# Altium PCB Y2.PcbDoc (part 1 of 2)
Units mm, origin at the board's own origin, x right, y up, seen from the top; angles counter-clockwise.
Board outline 43.44 x 34.75 mm, 4 copper layers (Top Layer, Layer 1, Layer 2, Bottom Layer), stack 1.627 mm thick; 51 components, 77 nets, 335 pads, 113 vias.
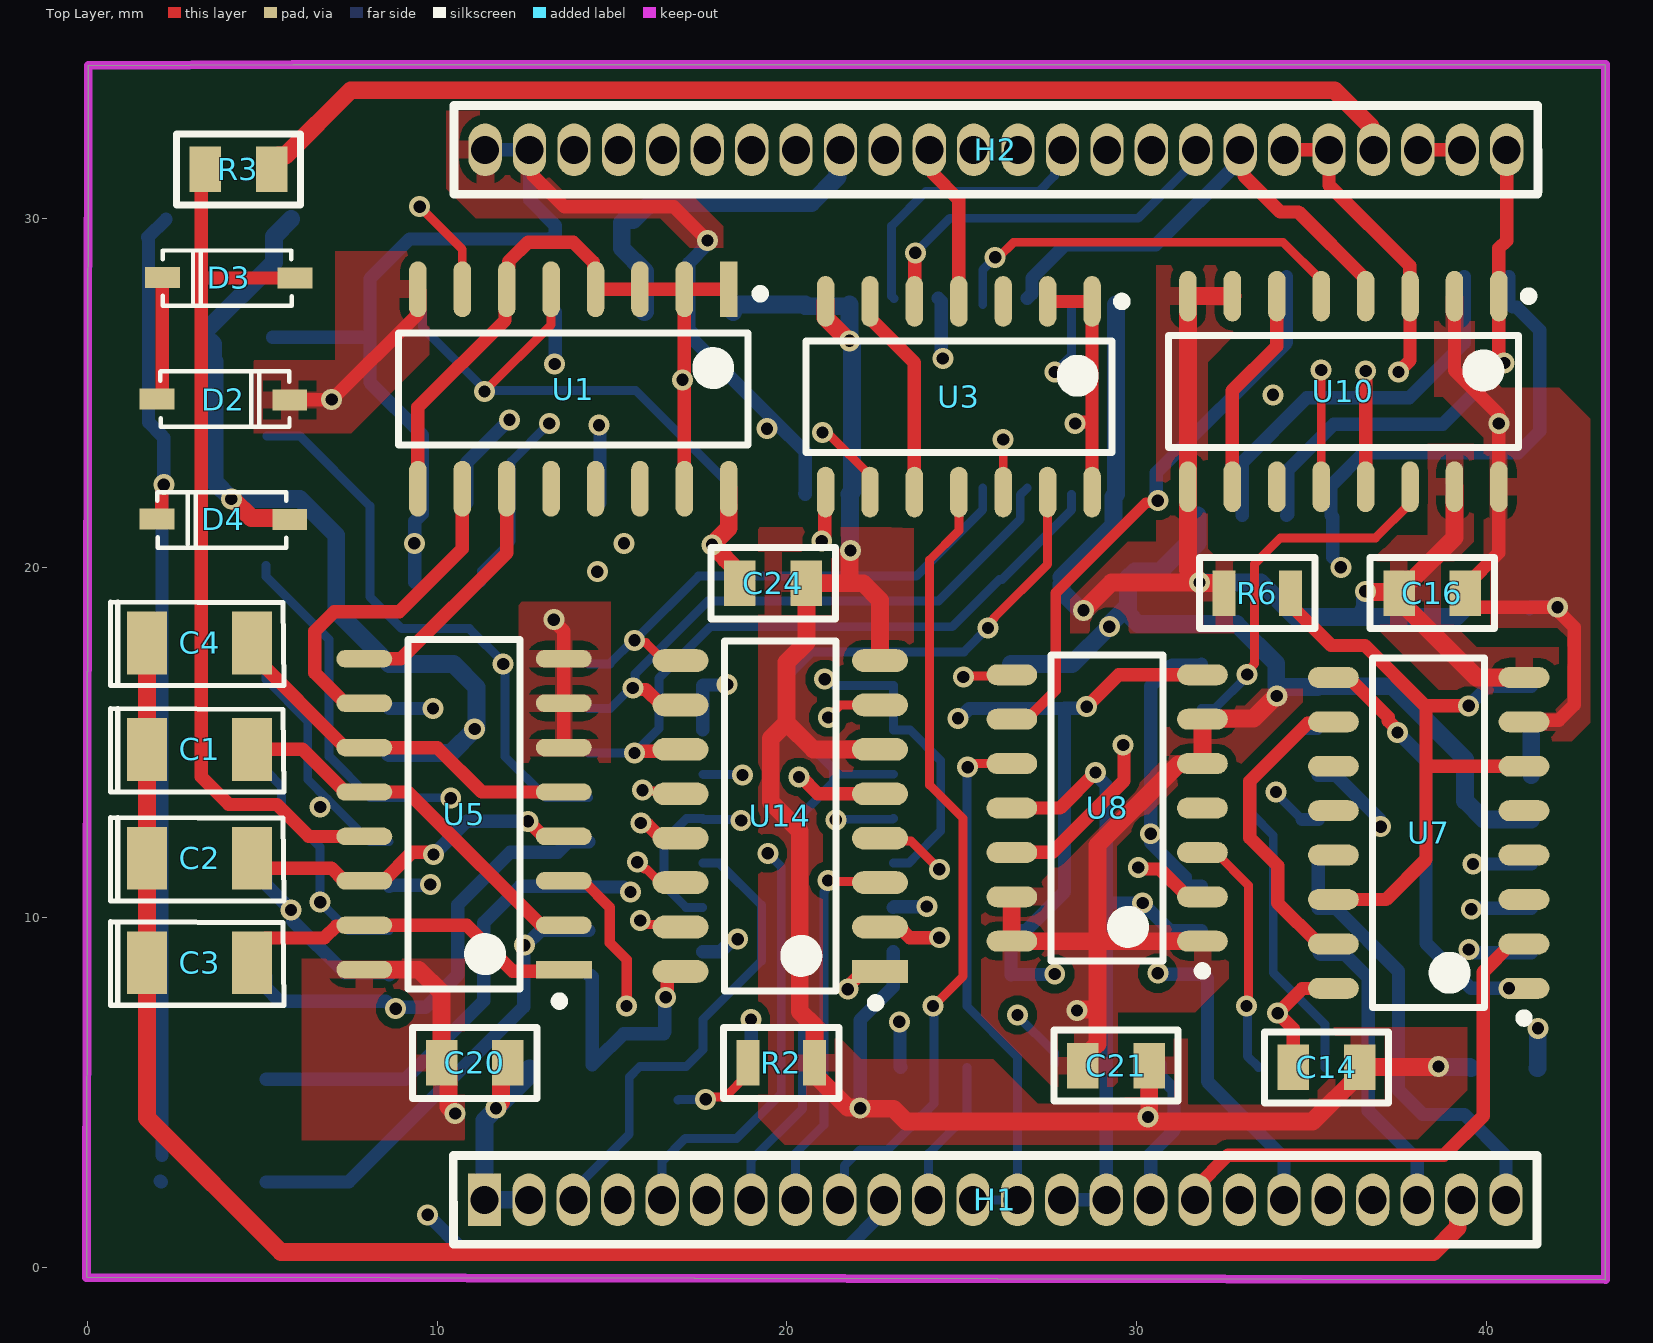
[diagram p0: Top Layer view]
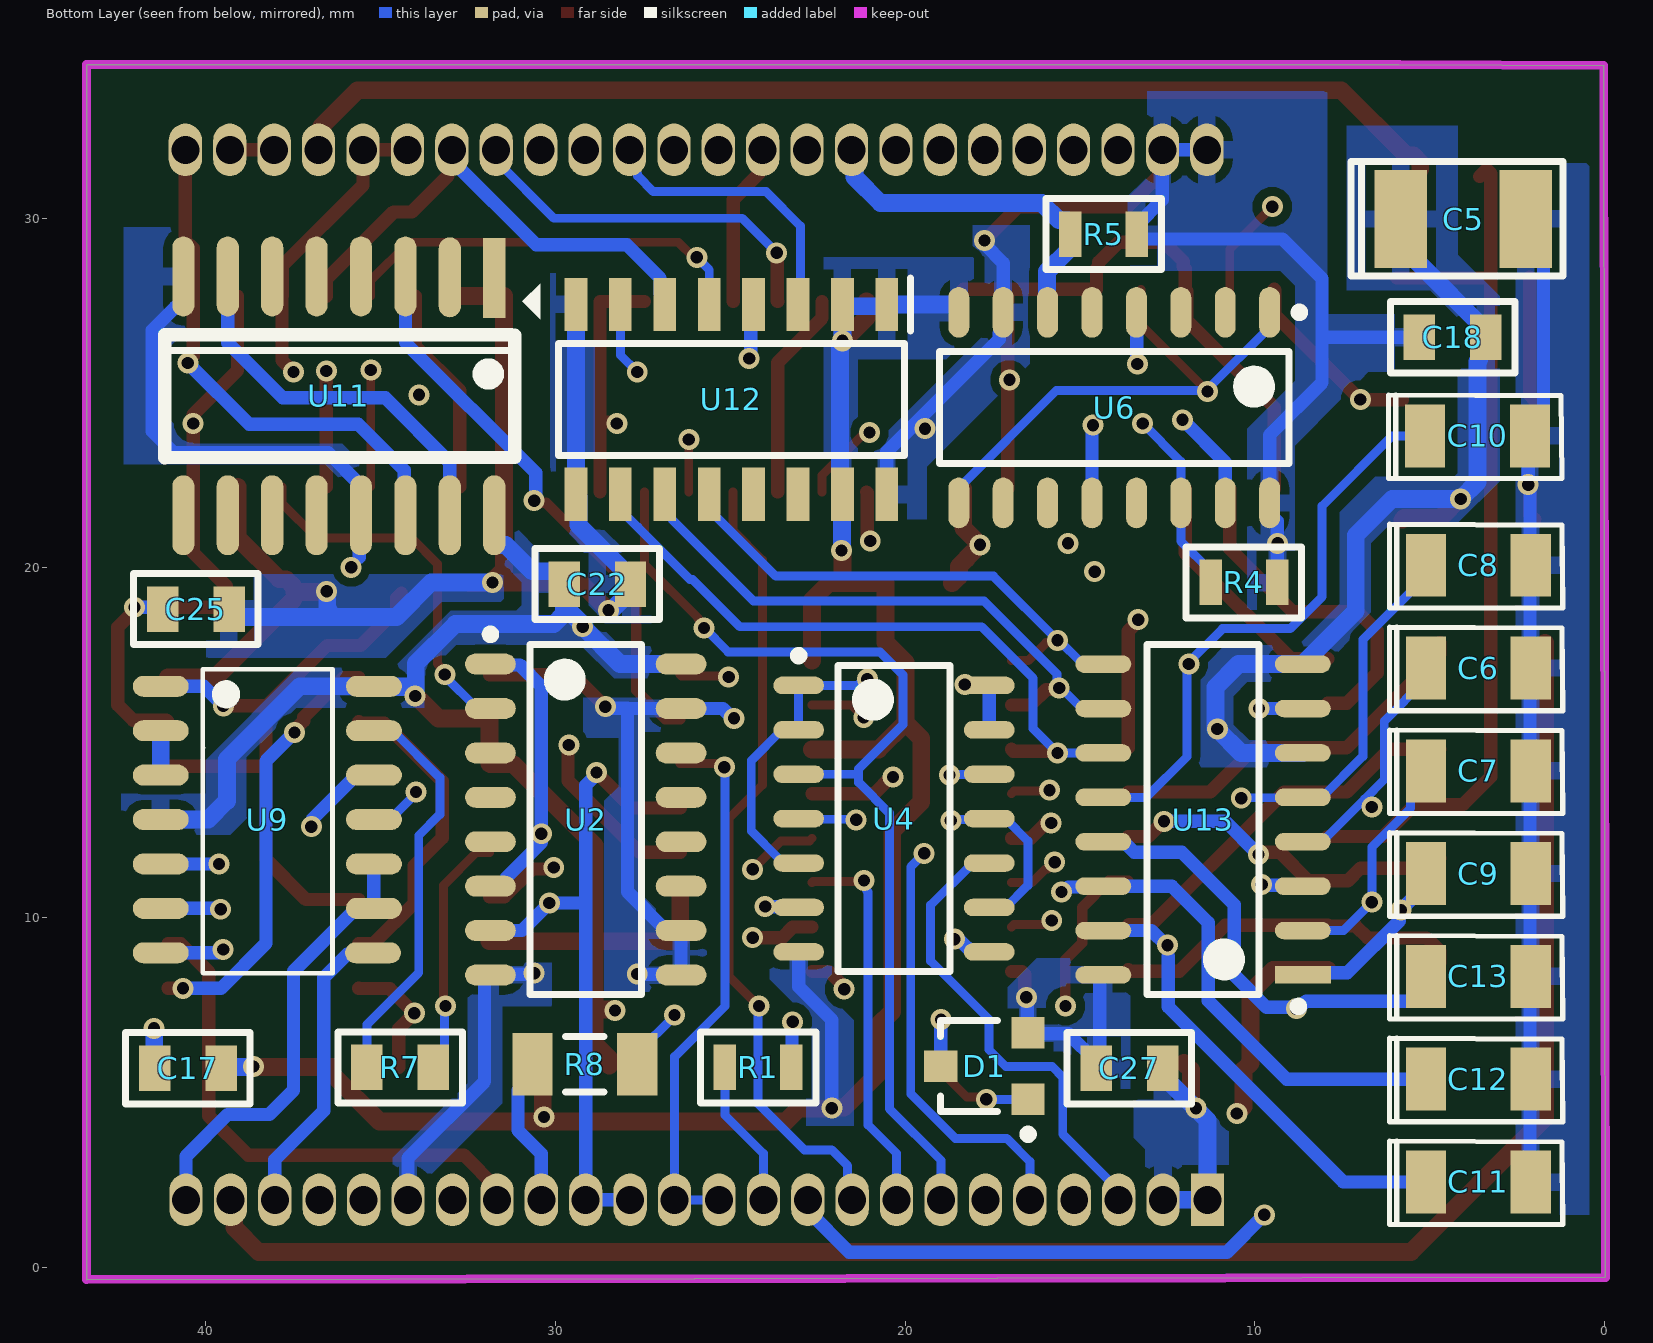
[diagram p1: Bottom Layer view, seen from below]
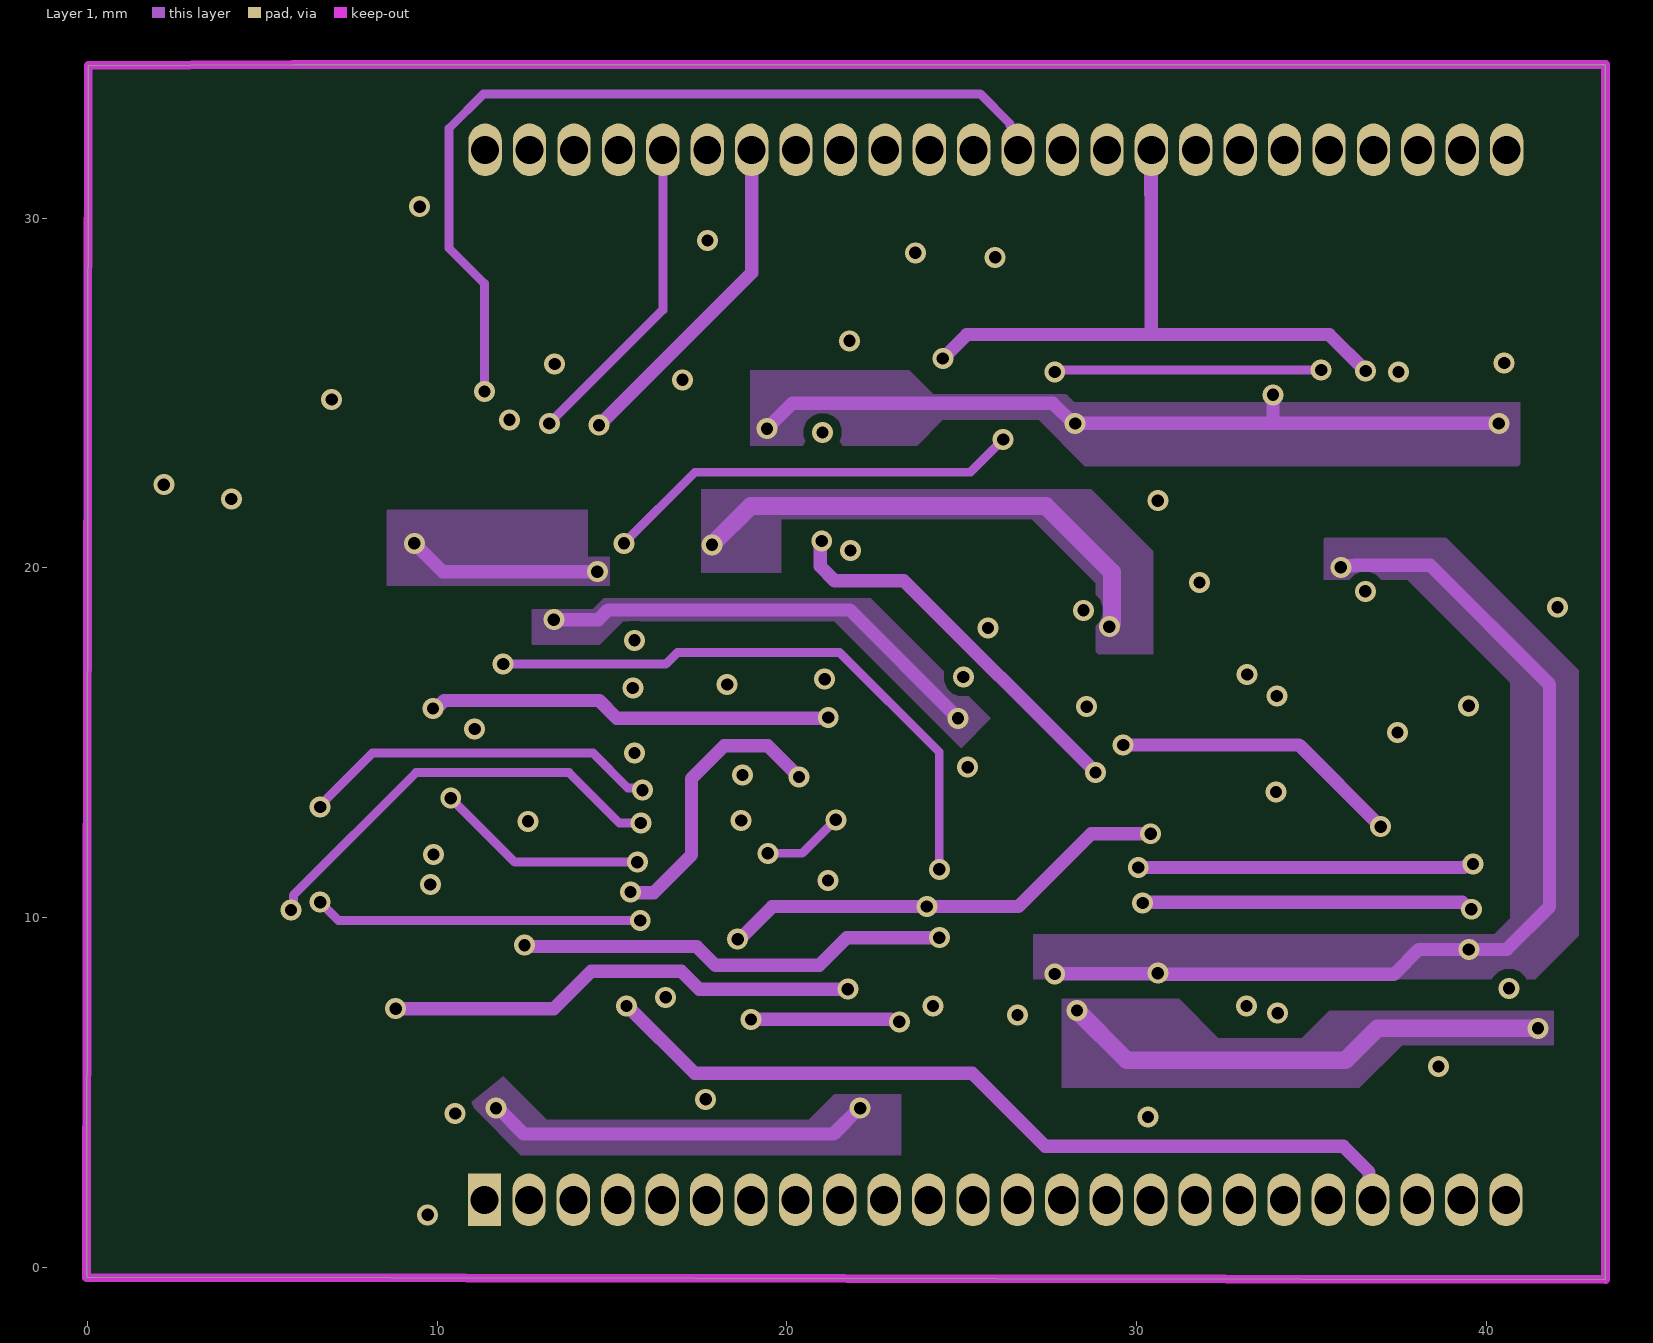
[diagram p2: Layer 1]
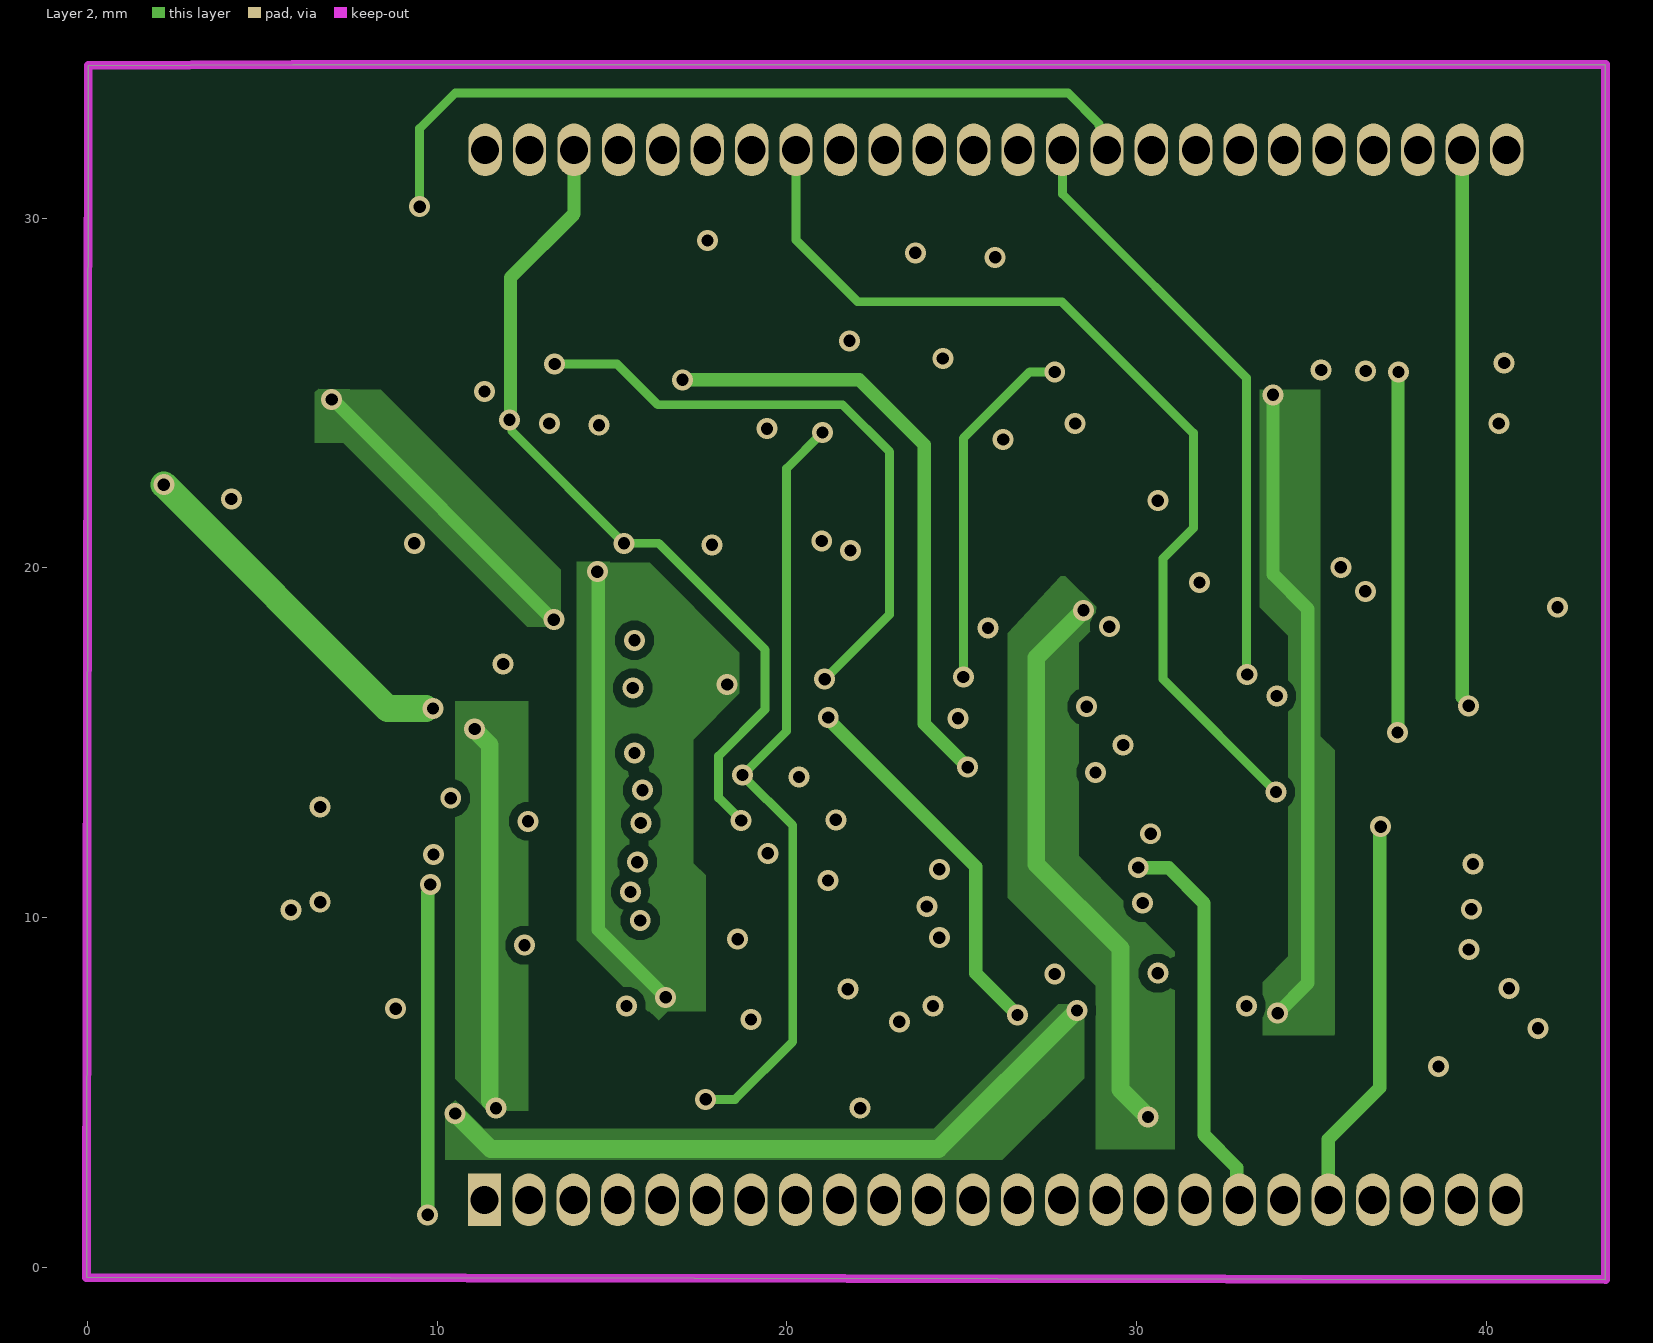
[diagram p3: Layer 2]

## Layer stack, top to bottom
Top Solder: solder mask 0.0102, Solder Resist, Dk 3.5
Top Layer: signal copper 0.0356
Dielectric 2: prepreg 0.2104, PP-006, Dk 4.1
Layer 1: signal copper 0.035
Dielectric 1: dielectric 1.065, FR-4, Dk 4.8
Layer 2: signal copper 0.035
Dielectric 3: prepreg 0.2104, PP-006, Dk 4.1
Bottom Layer: signal copper 0.0356
Bottom Solder: solder mask 0.0102, Solder Resist, Dk 3.5

## Board outline
-0.026,-0.291 43.409,-0.355 43.409,34.392 5.865,34.392 0.023,34.364

## Design rules (kind name [scope] priority, off if disabled: settings)
Clearance [All] p1: gap=0.254 ignorepadtopadclearanceinfootprint=FALSE
MinimumSolderMaskSliver [All] p1: minsoldermaskwidth=0.102
PolygonConnect PolygonConnect_VIA [IsVia] p1: connectstyle=Direct reliefconductorwidth=0.254 reliefentries=4 polygonreliefangle="90 Angle" airgapwidth=0.254
PolygonConnect [All] p2: connectstyle=Relief reliefconductorwidth=0.508 reliefentries=4 polygonreliefangle="90 Angle" airgapwidth=0.254
RoutingVias [All] p1: holewidth=0.35 width=0.6 viastyle="Through Hole" minholewidth=0.3 minwidth=0.5 maxholewidth=0.4 maxwidth=0.6
SilkToSolderMaskClearance [IsPad] p1: minsilkscreentomaskgap=0.102 clearancetoexposedcopper=TRUE
SolderMaskExpansion [All] p1: expansion=0.102 istentingtop=FALSE
Width Width_PWR [(InNet('GND_9V') OR InNet('+5V') OR InNet('+9V'))] p1: maxlimit=2.54 minlimit=0.381 preferedwidth=0.762
Width [All] p2: maxlimit=2.54 minlimit=0.254 preferedwidth=0.381
28 further rules are at their usual default settings.

## Components (designator, comment, footprint, x,y, rotation, side; value= is the part's Value field where it differs from the comment)
C1 "6.8uF/16V" 3216 3.204,14.808 r0 top value="47uF/16 - 50V"
C2 "6.8uF/16V" 3216 3.204,11.694 r0 top value="47uF/16 - 50V"
C3 "6.8uF/16V" 3216 3.204,8.707 r0 top value="47uF/16 - 50V"
C4 "6.8uF/16V" 3216 3.204,17.856 r0 top value="47uF/16 - 50V"
C5 "22uF/16V" 3528 4.039,29.972 r90 bottom value=10uF/50V
C6 "3.3uF/16V" 3216 3.607,17.134 r180 bottom value=10uF/50V
C7 "3.3uF/16V" 3216 3.607,14.195 r180 bottom value=10uF/50V
C8 "3.3uF/16V" 3216 3.607,20.073 r180 bottom value=10uF/50V
C9 "3.3uF/16V" 3216 3.607,11.256 r180 bottom value=10uF/50V
C10 "3.3uF/16V" 3216 3.632,23.774 r180 bottom value=10uF/50V
C11 "3.3uF/16V" 3216 3.607,2.438 r180 bottom value=10uF/50V
C12 "3.3uF/16V" 3216 3.607,5.378 r180 bottom value=10uF/50V
C13 "3.3uF/16V" 3216 3.607,8.317 r180 bottom value=10uF/50V
C14 "C0.1uF_50V" C0805 35.433,5.715 r180 top
C16 "C0.1uF_50V" C0805 38.456,19.279 r0 top
C17 "C0.1uF_50V" C0805 40.513,5.69 r0 bottom
C18 "C0.1uF_50V" C0805 4.343,26.594 r0 bottom
C20 "C0.1uF_50V" C0805 11.074,5.842 r180 top
C21 "C0.1uF_50V" C0805 29.413,5.766 r180 top
C22 "C0.1uF_50V" C0805 28.804,19.533 r0 bottom
C24 "C0.1uF_50V" C0805 19.609,19.558 r180 top
C25 "C0.1uF_50V" C0805 40.284,18.821 r0 bottom
C27 "C0.1uF_50V" C0805 13.589,5.69 r0 bottom
D1 "BAW56" sot-23 16.485,4.801 r90 bottom
D2 "1N4148" SOD123 3.886,24.812 r0 top
D3 "1N4148" SOD123 4.039,28.296 r180 top
D4 "1N4148" SOD123 3.886,21.387 r180 top
H1 "Header 24" "header 24"#1 25.959,1.927 r0 top
H2 "Header 24" "header 24"#2 25.978,31.953 r180 top
R1 "20k" R0805 24.206,5.715 r180 bottom
R2 "20k" R0805 19.837,5.842 r0 top
R3 "10k" C0805 4.318,31.394 r0 top
R4 "10k" R0805 10.312,19.583 r180 bottom
R5 "10k" R0805 14.326,29.54 r0 bottom
R6 "51k" R0805 33.452,19.279 r180 top
R7 "51k" C0805 34.442,5.715 r0 bottom
R8 "10k" 1206 28.778,5.169 r180 bottom
U1 "U1-MC14008" soic16n#1 13.894,25.113 r270 top
U2 "CD4520BM" D0016A_N#1 29.134,12.802 r180 bottom
U3 "CD4001BM" D0014A_N#1 24.917,24.892 r270 top
U4 "CD4011BM" D0014A_N#1 20.32,12.827 r180 bottom
U5 "U5-CD4052" soic16n#1 10.77,12.954 r180 top
U6 "CD4015BM" D0016A_N#1 14.021,24.58 r270 bottom
U7 "CD4015BM" D0016A_N#1 38.354,12.421 r180 top
U8 "CD4030BM" D0014A_N#2 29.159,13.132 r180 top
U9 "CD4016" SOIC14 38.252,12.802 r180 bottom
U10 "CD4520BM" D0016A_N#2 35.916,25.044 r270 top
U11 "CD4022BCM" SOP16 36.195,24.917 r0 bottom
U12 "MC14008BDR2G" SOIC127P600X175-16N 24.968,24.816 r270 bottom
U13 "KP2-CD4051" soic16n#1 11.481,12.802 r0 bottom
U14 "CD4051" soic16n#2 19.812,12.903 r180 top

## Footprints (in the part's own frame and the unit in brackets; to place one, negate y for a bottom-side part, rotate by r counter-clockwise, add the part's x,y. Pads: shape width x height; smd on the part's side, far side on the other; paste and mask are expansions set on the pad)
1206 [mm]
  rect 1.15x1.8 smd: 1(-1.881,0.635) 2(1.119,0.635)
  silkscreen extent -0.93,-0.16 0.17,1.44, body extent -2.08,-0.26 1.32,1.54, height 1
3216 [mm] "Tantalum type A 1206"
  rect 1.15x1.8 smd: 1(-1.5,0) 2(1.5,0)
  silkscreen extent -2.54,-1.22 2.41,1.17, body extent -1.7,-0.9 1.7,0.9, height 1
3528 [mm] "Tantalum Type B  1411"
  rect 2.8x1.5 smd: 1(0,1.791) 2(0,-1.791)
  silkscreen extent -1.63,-2.86 1.65,3.21, body extent -1.42,-1.81 1.4,1.88, height 2.11
C0805 [mm]
  rect 0.9x1.3 smd: 1(-0.95,0) 2(0.95,0)
  silkscreen extent -1.78,-1.02 1.78,1.02, body extent -1,-0.6 1,0.6, height 1.5
D0014A_N#1 [mm] "SOIC, 14-Leads, Body 8.75x4mm, Pitch 1.27mm, IPC Medium Density"
  oval 1.45x0.5 smd: 1(-2.725,3.81) 2(-2.725,2.54) 3(-2.725,1.27) 4(-2.725,0) 5(-2.725,-1.27) 6(-2.725,-2.54) 7(-2.725,-3.81) 8(2.725,-3.81) 9(2.725,-2.54) 10(2.725,-1.27) 11(2.725,0) 12(2.725,1.27) 13(2.725,2.54) 14(2.725,3.81)
  silkscreen extent -2.85,-4.38 1.6,4.79, body extent -3.02,-4.32 3.02,4.32, height 1.75
D0014A_N#2 [mm] "SOIC, 14-Leads, Body 8.75x4mm, Pitch 1.27mm, IPC Medium Density"
  oval 1.45x0.6 smd: 1(-2.725,3.81) 2(-2.725,2.54) 3(-2.725,1.27) 4(-2.725,0) 5(-2.725,-1.27) 6(-2.725,-2.54) 7(-2.725,-3.81) 8(2.725,-3.81) 9(2.725,-2.54) 10(2.725,-1.27) 11(2.725,0) 12(2.725,1.27) 13(2.725,2.54) 14(2.725,3.81)
  silkscreen extent -2.85,-4.38 1.6,4.78, body extent -3.02,-4.32 3.02,4.32, height 1.75
D0016A_N#1 [mm] "SOIC, 16-Leads, Body 10x4mm, Pitch 1.27mm, IPC Medium Density"
  oval 1.45x0.6 smd: 1(-2.725,4.445) 2(-2.725,3.175) 3(-2.725,1.905) 4(-2.725,0.635) 5(-2.725,-0.635) 6(-2.725,-1.905) 7(-2.725,-3.175) 8(-2.725,-4.445) 9(2.725,-4.445) 10(2.725,-3.175) 11(2.725,-1.905) 12(2.725,-0.635) 13(2.725,0.635) 14(2.725,1.905) 15(2.725,3.175) 16(2.725,4.445)
  silkscreen extent -2.85,-5 1.6,5.42, body extent -3,-4.95 3,4.95, height 1.59
D0016A_N#2 [mm] "SOIC, 16-Leads, Body 10x4mm, Pitch 1.27mm, IPC Medium Density"
  oval 1.45x0.5 smd: 1(-2.725,4.445) 2(-2.725,3.175) 3(-2.725,1.905) 4(-2.725,0.635) 5(-2.725,-0.635) 6(-2.725,-1.905) 7(-2.725,-3.175) 8(-2.725,-4.445) 9(2.725,-4.445) 10(2.725,-3.175) 11(2.725,-1.905) 12(2.725,-0.635) 13(2.725,0.635) 14(2.725,1.905) 15(2.725,3.175) 16(2.725,4.445)
  silkscreen extent -2.85,-5 1.6,5.42, body extent -3,-4.95 3,4.95, height 1.75
"header 24"#1 [mm]
  rect 0.95x1.5 hole 0.8: 1(-14.605,0)
  oval 0.95x1.5 hole 0.8: 2(-13.335,0) 3(-12.065,0) 4(-10.795,0) 5(-9.525,0) 6(-8.255,0) 7(-6.985,0) 8(-5.715,0) 9(-4.445,0) 10(-3.175,0) 11(-1.905,0) 12(-0.635,0) 13(0.635,0) 14(1.905,0) 15(3.175,0) 16(4.445,0) 17(5.715,0) 18(6.985,0) 19(8.255,0) 20(9.525,0) 21(10.795,0) 22(12.065,0) 23(13.335,0) 24(14.605,0)
  silkscreen extent -15.5,-1.27 15.49,1.27
"header 24"#2 [mm]
  oval 0.95x1.5 hole 0.8: 1(-14.605,0) 2(-13.335,0) 3(-12.065,0) 4(-10.795,0) 5(-9.525,0) 6(-8.255,0) 7(-6.985,0) 8(-5.715,0) 9(-4.445,0) 10(-3.175,0) 11(-1.905,0) 12(-0.635,0) 13(0.635,0) 14(1.905,0) 15(3.175,0) 16(4.445,0) 17(5.715,0) 18(6.985,0) 19(8.255,0) 20(9.525,0) 21(10.795,0) 22(12.065,0) 23(13.335,0) 24(14.605,0)
  silkscreen extent -15.5,-1.27 15.49,1.27
R0805 [mm]
  rect 0.65x1.3 smd: 1(-0.95,0) 2(0.95,0)
  silkscreen extent -1.65,-1.02 1.65,1.02, body extent -1,-0.6 1,0.6, height 0.7
SOD123 [mm]
  rect 1x0.6 smd: 1(-1.899,0.01) 2(1.899,-0.01)
  silkscreen extent -1.8,-0.78 1.89,0.81, body extent -1.8,-0.8 1.9,0.8, height 1.27
SOIC14 [mm]
  oval 1.6x0.6 smd: 1(-3.035,3.81) 2(-3.035,2.54) 3(-3.035,1.27) 4(-3.035,0) 5(-3.035,-1.27) 6(-3.035,-2.54) 7(-3.035,-3.81) 8(3.035,-3.81) 9(3.06,-2.54) 10(3.06,-1.27) 11(3.06,0) 12(3.06,1.27) 13(3.06,2.54) 14(3.06,3.81)
  silkscreen extent -1.83,-4.4 1.88,4.3, body extent -2.97,-4.37 3.03,4.38, height 1.75
soic16n#1 [mm] "SOIC, 16-Leads, Body 9.90x3.90mm, Pitch 1.27mm, IPC Medium Density"
  rect 1.6x0.5 smd: 1(-2.852,4.445)
  oval 1.6x0.5 smd: 2(-2.852,3.175) 3(-2.852,1.905) 4(-2.852,0.635) 5(-2.852,-0.635) 6(-2.852,-1.905) 7(-2.852,-3.175) 8(-2.852,-4.445) 9(2.852,-4.445) 10(2.852,-3.175) 11(2.852,-1.905) 12(2.852,-0.635) 13(2.852,0.635) 14(2.852,1.905) 15(2.852,3.175) 16(2.852,4.445)
  silkscreen extent -2.85,-5 1.6,5.47, body extent -3.06,-5 3.02,5, height 1.65
soic16n#2 [mm] "SOIC, 16-Leads, Body 9.90x3.90mm, Pitch 1.27mm, IPC Medium Density"
  rect 1.6x0.65 smd: 1(-2.852,4.445)
  oval 1.6x0.65 smd: 2(-2.852,3.175) 3(-2.852,1.905) 4(-2.852,0.635) 5(-2.852,-0.635) 6(-2.852,-1.905) 7(-2.852,-3.175) 8(-2.852,-4.445) 9(2.852,-4.445) 10(2.852,-3.175) 11(2.852,-1.905) 12(2.852,-0.635) 13(2.852,0.635) 14(2.852,1.905) 15(2.852,3.175) 16(2.852,4.445)
  silkscreen extent -2.85,-5 1.6,5.47, body extent -3.06,-5 3.02,5, height 1.65
SOIC127P600X175-16N [mm]
  rect 1.525x0.65 smd: 1(-2.712,4.445) 2(-2.712,3.175) 3(-2.712,1.905) 4(-2.712,0.635) 5(-2.712,-0.635) 6(-2.712,-1.905) 7(-2.712,-3.175) 8(-2.712,-4.445) 9(2.712,-4.445) 10(2.712,-3.175) 11(2.712,-1.905) 12(2.712,-0.635) 13(2.712,0.635) 14(2.712,1.905) 15(2.712,3.175) 16(2.712,4.445)
  silkscreen extent -3.47,-4.95 1.6,5.12, body extent -3.01,-4.94 3.01,4.96, height 1.75
SOP16 [mil]
  rect 25x90 smd: 1(-175,-132.45)
  oval 25x90 smd: 2(-125,-133.44) 3(-75,-134.42) 4(-25,-134.42) 5(25,-134.42) 6(75,-134.42) 7(125,-134.41) 8(175,-134.41) 9(175,134.41) 10(125,134.42) 11(75,134.42) 12(25,134.42) 13(-25,134.42) 14(-75,134.42) 15(-125,134.42) 16(-175,134.42)
  silkscreen extent -227,-126 196,70, body extent -197,-119 197,120, height 65
sot-23 [mm]
  rect 0.9x0.95 smd: 1(0,0) 2(1.9,0) 3(0.95,2.5)
  silkscreen extent -1.12,-0.12 2.25,2.5, body extent -0.48,-0.19 2.42,2.61, height 1.3

## Part data
C1 C2 C3 C4: library part CP2, "C 47uF/50V , 220uF/16V", Description 1="470uF/6,3V - 330uF/10V - 220uF/16V", Description 2="100uF/25V - 35V - 47uF/50V - 22uF/100V", Description 3="33uF => 47uF/63V - 1uF => 4,7uF/160V", Description 4="1uF => 2,2uF/250V - 1uF/350V"
C5 C6 C7 C8 C9 C10 C11 C12 C13: library part CP1, "Cap P  0,1uF < 22uF , 16 - 50V", Description 1="10 => 220uF/6,3V/10V - 10uF => 100uF/16V", Description 2="0,1uF => 33uF/50V - 10uF => 22uF/63V", Description 3="0,47uF => 10uF/100V"
D1: library part UF3
D2 D3 D4: library part "Diode S4", "Dán", Chung_Loai=Dán, Don_Vi=Con, Ma_Hang=MH005519, Ten_Linh_Kien="Diode S4 SOD123 ( 1N5819 SOD123)"
R1 R2 R3 R4 R5 R6 R7 R8: library part Res, "Standard resistor", ASiD Part Number=Res-AS
U2 U10: "CMOS Dual Binary Up-Counter, D0016A, TUBE", F @ Nom Voltage(Max)(Mhz)=8, Generic Part Number=CD4520B, ICC @ Nom Voltage(Max)(mA)=0.03, Manufacturer="Texas Instruments", Operating Temperature Range(C)="-55 to 125", Rating=Catalog, Supplier Part Number 1=595-CD4520BM, tpd @ Nom Voltage(Max)(ns)=230, Voltage(Nom)(V)=5,10,15, Bits(#)=4, Code_JEDEC="MS-012 variation AC", ComponentLink1Description="Manufacturer URL", ComponentLink1URL=http://www.ti.com/, ComponentLink2Description=Datasheet, ComponentLink2URL=http://www.ti.com/lit/ds/symlink/cd4520b.pdf, ComponentLink3Description="Package Specification", ComponentLink3URL=http://www.ti.com/lit/ml/mpds178g/mpds178g.pdf, DatasheetVersion=SCHS076D, Function=Counter, Input Type=CMOS, Inputs=1, Output Drive (IOL/IOH)(Max)(mA)=1.5/-1.5, Output Type=CMOS, PackageReference=D0016A, PartNumber=CD4520BM, Schmitt Trigger=No, Supplier 1=Mouser, Supplier 2=Digi-Key, Supplier Part Number 2=296-32927-5-ND, Technology Family=CD4000, Type=Binary, VCC(Max)(V)=18, VCC(Min)(V)=3
U3: "CMOS Quad 2-Input NOR Gate, D0014A, TUBE", F @ Nom Voltage(Max)(Mhz)=8, Generic Part Number=CD4001B, ICC @ Nom Voltage(Max)(mA)=0.015, Manufacturer="Texas Instruments", Operating Temperature Range(C)="-55 to 125", Rating=Military, tpd @ Nom Voltage(Max)(ns)=120, Voltage(Nom)(V)=10, Bits(#)=4, Code_JEDEC=MS-012, ComponentLink1Description="Manufacturer URL", ComponentLink1URL=http://www.ti.com/, ComponentLink2Description=Datasheet, ComponentLink2URL=http://www.ti.com/lit/ds/symlink/cd4001b.pdf, ComponentLink3Description="Package Specification", ComponentLink3URL=http://www.ti.com/lit/ml/mpds177g/mpds177g.pdf, DatasheetVersion=SCHS015C, Input Type=CMOS, Output Drive (IOL/IOH)(Max)(mA)=1.5/-1.5, Output Type=CMOS, PackageReference=D0014A, PartNumber=CD4001BM, VCC(Max)(V)=18, VCC(Min)(V)=3
U4: "CMOS Quad 2-Input NAND Gate, D0014A, TUBE", F @ Nom Voltage(Max)(Mhz)=8, Generic Part Number=CD4011B, ICC @ Nom Voltage(Max)(mA)=0.015, Manufacturer="Texas Instruments", Operating Temperature Range(C)="-55 to 125", Rating=Military, Supplier Part Number 1=595-CD4011BM, Voltage(Nom)(V)=10, Bits(#)=4, Code_JEDEC=MS-012, ComponentLink1Description="Manufacturer URL", ComponentLink1URL=http://www.ti.com/, ComponentLink2Description=Datasheet, ComponentLink2URL=http://www.ti.com/lit/ds/symlink/cd4011b.pdf, ComponentLink3Description="Package Specification", ComponentLink3URL=http://www.ti.com/lit/ml/mpds177g/mpds177g.pdf, DatasheetVersion=SCHS021D, Input Type=CMOS, Output Drive (IOL/IOH)(Max)(mA)=1.5/-1.5, Output Type=CMOS, PackageReference=D0014A, PartNumber=CD4011BM, Schmitt Trigger=No, Supplier 1=Mouser, Supplier 2=Digi-Key, Supplier Part Number 2=296-3507-5-ND, Technology Family=CD4000, VCC(Max)(V)=18, VCC(Min)(V)=3
U6 U7: "CMOS Dual 4-Stage Static Shift Register, D0016A, TUBE", F @ Nom Voltage(Max)(Mhz)=8, Generic Part Number=CD4015B, ICC @ Nom Voltage(Max)(mA)=0.3, Manufacturer="Texas Instruments", Operating Temperature Range(C)="-55 to 125", Rating=Catalog, tpd @ Nom Voltage(Max)(ns)=160, Voltage(Nom)(V)=10, 3-State Output=No, Bits=4, Code_JEDEC="MS-012 variation AC", ComponentLink1Description="Manufacturer URL", ComponentLink1URL=http://www.ti.com/, ComponentLink2Description=Datasheet, ComponentLink2URL=http://www.ti.com/lit/ds/symlink/cd4015b.pdf, ComponentLink3Description="Package Specification", ComponentLink3URL=http://www.ti.com/lit/ml/mpds178g/mpds178g.pdf, DatasheetVersion=SCHS025D, Input Type=CMOS, Output Drive (IOL/IOH)(Max)(mA)=1.5/-1.5, Output Type=CMOS, PackageReference=D0016A, PartNumber=CD4015BM, Technology Family=CD4000, VCC(Max)(V)=18, VCC(Min)(V)=3
U8: "CMOS Quad Exclusive-OR Gate, D0014A, TUBE", F @ Nom Voltage(Max)(Mhz)=8, Generic Part Number=CD4030B, ICC @ Nom Voltage(Max)(mA)=0.015, Manufacturer="Texas Instruments", Operating Temperature Range(C)="-55 to 125", Rating=Military, Supplier Part Number 1=595-CD4030BM, tpd @ Nom Voltage(Max)(ns)=130, Voltage(Nom)(V)=10, Bits(#)=4, ComponentLink1Description="Manufacturer URL", ComponentLink1URL=http://www.ti.com/, ComponentLink2Description=Datasheet, ComponentLink2URL=http://www.ti.com/lit/ds/symlink/cd4030b.pdf, DatasheetVersion=SCHS035C, Input Type=CMOS, Output Drive (IOL/IOH)(Max)(mA)=1.5/-1.5, Output Type=CMOS, PackageReference=D0014A, PartNumber=CD4030BM, Schmitt Trigger=No, Supplier 1=Mouser, Supplier 2=Digi-Key, Supplier Part Number 2=296-14263-5-ND, Technology Family=CD4000, VCC(Max)(V)=18, VCC(Min)(V)=3
U11: "Divide by 8 Counter/Divider with 8 Decoded Outputs", Code_IPC=SOIC127P600-16, ComponentLink1Description="Manufacturer Link", ComponentLink1URL=http://www.fairchildsemi.com/, ComponentLink2Description=Datasheet, ComponentLink2URL=http://www.fairchildsemi.com/ds/CD%2FCD4017BC.pdf, DatasheetVersion=Jan-1999, LatestRevisionDate=13-Apr-2006, LatestRevisionNote="IPC-7351 Footprint Added.", Note="NC pins 6 and 9 are not drawn.", PackageDescription="16-Pin Small Outline Integrated Circuit 1.27 mm Pitch", PackageReference=M16A, PackageVersion=2000, Published=17-Jul-2002, Publisher="Altium Limited"
U12: "THAY THẾ CD4008", Manufacturer_Name=onsemi, Mouser Part Number=863-MC14008BDR2G, Arrow Part Number=MC14008BDR2G, Arrow Price/Stock=https://www.arrow.com/en/products/mc14008bdr2g/on-semiconductor?utm_currency=USD&region=nac, Datasheet Link=https://www.onsemi.com/pub/Collateral/MC14008B-D.PDF, Height=1.75mm, Manufacturer_Part_Number=MC14008BDR2G, Mouser Price/Stock=https://www.mouser.co.uk/ProductDetail/onsemi/MC14008BDR2G?qs=k%252B8dvkBktS20Fsy6mJwU%252Bg%3D%3D

## Via types
v1: diameter 0.6, hole 0.35, Top Layer to Bottom Layer, tented both sides, 113 vias

## Nets (pads, with @x,y where several pads share a name; then routed paths per layer and width w, separated by ;. In a path a pad name is that pad's centre, name@x,y a point inside that pad or via, vN(x,y) a via of type N, cw(c..) or ccw(c..) an arc to the next point about the centre after c; other vN are vias at no path point)
2_1: C5.1 C14.1 C16.1 C17.1 C18.1 C20.1 C21.1 C22.1 C24.1 C25.1 C27.1 D4.1 H1.1 H1.2 R2.2 R6.2 U3.7 U4.7 U6.8 U7.8 U10.7 U10.8 U10.9 U10.15 U12.1 U12.2 U12.8 U12.9 U12.15 U13.6 U13.8 U14.6 U14.8 | length 173.8
  Top Layer w0.508: v1(4.115,21.971) 4.14,21.971 4.688,21.423 5.739,21.423 D4.1 ; v1(11.684,4.547) 11.684,4.571 11.828,4.716 11.828,5.646 C20.1 ; U3.7 21.107,27.15 21.748,26.51 21.776,26.51 v1(21.793,26.492) v1@21.806,26.479 ; v1(21.819,20.498) 21.793,20.472 21.793,19.558 ; U14.6 20.752,14.808 19.99,15.57 ; U14.8 22.664,19.075 22.181,19.558 21.793,19.558 ; v1(28.486,18.783) 29.287,19.583 v1(31.801,19.583) ; v1@30.328,4.166 23.414,4.166 23.051,4.529 22.116,4.529 22.08,4.564 21.74,4.564 20.787,5.517 20.787,6.899 20.371,7.315 20.371,12.471 19.537,13.305 19.537,15.118 19.99,15.57 ; v1@30.363,4.166 35.034,4.166 36.383,5.515 C14.1 36.396,5.728 38.621,5.728 v1(38.633,5.74) ; v1@30.363,4.293 C21.1 ; R6.2@32.431,19.558 32.431,19.566 31.818,19.566 v1(31.801,19.583) ; U10.7 U10.8 U10.9 31.471,19.938 31.801,19.608 v1(31.801,19.583) ; v1(36.542,19.329) 36.56,19.312 C16.1@37.472,19.312 ; C16.1@37.506,19.079 39.719,16.866 U7.8 ; C16.1@37.506,19.479 37.702,19.675 37.902,19.675 39.091,20.864 U10.15 ; 19.99,15.57 19.99,17.297 20.559,17.866 C24.1 21.793,19.558
  Layer 1 w0.381: v1(11.684,4.547) 11.743,4.547 12.48,3.81 21.333,3.81 22.069,4.547 v1(22.098,4.547)
  Layer 2 w0.508: v1(11.074,15.388) 11.074,15.363 11.506,14.931 11.506,4.749 11.684,4.571 v1(11.684,4.547) ; v1(28.486,18.783) 27.133,17.43 27.133,11.526 29.54,9.119 29.54,5.08 v1(30.328,4.293)
  Bottom Layer w0.381: v1(22.098,4.547) 22.098,7.071 23.045,8.018 U4.7
  Bottom Layer w0.508: C5.1 5.333,29.476 5.333,28.734 3.393,26.794 C18.1 3.589,26.398 3.589,25.943 3.632,25.9 3.632,22.454 v1(4.115,21.971) 6.071,21.971 7.112,20.93 7.112,18.763 U13.8 10.465,17.247 11.125,16.586 v1@11.125,15.388 ; U13.6 10.393,14.707 v1(11.074,15.388) ; H1.2 H1.1 11.354,4.204 12.639,5.49 C27.1 ; U6.8 18.466,27.485 18.508,27.528 U12.1 ; U12.1@20.523,27.483 U12.2@21.722,27.483 ; U12.15 21.864,22.175 21.864,22.903 21.865,26.396 21.793,26.467 U12.2 ; U12.15@21.806,22.091 21.806,20.511 v1(21.819,20.498) ; C22.1 27.854,19.333 28.385,18.801 28.469,18.801 v1(28.486,18.783) ; C22.1@27.854,19.733 29.342,21.221 29.342,22.033 U12.9 U12.8 ; v1(31.801,19.583) 33.553,19.583 34.544,18.593 39.138,18.593 39.334,18.789 C25.1 ; 36.474,18.593 36.474,18.775 36.524,18.825 36.524,19.312 v1(36.542,19.329) ; v1(38.633,5.74) 38.651,5.723 39.53,5.723 C17.1
2_3: H1.3 U4.10 | length 13.6
  Bottom Layer w0.254: H1.3 13.894,2.202 15.494,3.802 15.494,5.436 15.799,5.74 17.12,5.74 17.602,6.223 17.602,7.087 19.274,8.758 19.274,10.353 18.07,11.557 U4.10
2_4: H1.4
2_5: H1.5 U4.4 | length 16.3
  Layer 1 w0.254: v1(19.456,11.836) 20.44,11.836 v1@21.398,12.794
  Bottom Layer w0.254: H1.5 16.434,3.023 17.094,3.683 18.567,3.683 19.841,4.956 19.841,11.452 v1(19.456,11.836) ; v1(21.399,12.793) 21.416,12.81 23.028,12.81 U4.4
2_6: H1.6
2_7: H1.7 U3.13 U4.3 | length 29.1
  Top Layer w0.254: v1(25.749,18.281) 25.749,18.375 25.92,18.546 25.92,18.565 27.457,20.103 U3.13
  Bottom Layer w0.254: H1.7 18.974,3.058 20.452,4.536 20.452,12.984 21.331,13.864 21.331,14.097 ; U4.3 21.331,14.097 ; v1(25.749,18.281) 25.065,17.597 20.722,17.597 20.066,16.942 20.066,15.517 21.331,14.252 21.331,14.097
2_8: H1.8 U14.3 | length 11
  Top Layer w0.254: v1(21.179,11.057) 21.208,11.028 22.635,11.028 U14.3
  Bottom Layer w0.254: H1.8 20.244,3.251 21.061,4.069 21.061,10.733 21.113,10.784 21.113,10.991 v1(21.179,11.057)
2_9: H1.9 U3.11 | length 22.9
  Top Layer w0.254: v1(24.181,7.468) 25.04,8.326 25.04,12.832 24.079,13.792 24.079,20.223 24.917,21.061 U3.11
  Bottom Layer w0.254: H1.9 21.647,2.06 21.647,2.902 22.098,3.353 22.885,3.353 24.206,4.674 24.206,7.442 v1(24.181,7.468)
2_10: H1.10 U13.3 | length 25
  Layer 2 w0.381: v1(9.728,1.499) 9.728,10.716 9.762,10.751 9.762,10.905 v1(9.804,10.947)
  Bottom Layer w0.381: U13.3 8.652,10.919 9.776,10.919 v1(9.804,10.947) ; v1(9.728,1.499) 10.795,0.432 21.594,0.432 22.784,1.622 H1.10
2_11: H1.11 R1.1 | length 4.2
  Bottom Layer w0.254: H1.11 24.054,3.251 25.156,4.354 R1.1
2_12: H1.12 H1.13 U1.1 U1.2 U1.3 U1.4 U1.6 U1.9 U1.15 U8.10 | length 53.7
  Top Layer w0.254: v1(25.171,14.3) 25.265,14.3 25.367,14.402 U8.10
  Top Layer w0.381: U1.9 9.449,24.587 11.942,27.08 11.942,27.918 U1.6 11.989,28.548 12.048,28.607 12.048,28.761 12.598,29.312 13.894,29.312 14.469,28.736 14.469,28.607 14.529,28.548 U1.4 U1.3 U1.2 ; U1.15 U1.2 ; U1.1 U1.2
  Layer 2 w0.381: v1(17.018,25.375) 22.073,25.375 23.927,23.52 23.927,15.545 v1(25.171,14.3)
  Bottom Layer w0.254: v1(25.171,14.3) 25.146,14.275 25.146,7.47 26.594,6.022 H1.13 H1.12
2_14: H1.14 H1.15 U2.7 U3.8 U8.11 U9.6 | length 43.1
  Top Layer w0.381: v1(20.998,20.764) 20.998,20.823 21.085,20.91 21.085,22.144 U3.8 ; U8.11 27.813,13.132 v1(28.829,14.148)
  Layer 1 w0.381: v1(20.998,20.764) 20.956,20.722 20.956,20.042 20.955,20.041 21.361,19.634 23.343,19.634 v1(28.829,14.148) ; v1@30.276,10.439 39.311,10.439 39.514,10.236 v1(39.573,10.236)
  Bottom Layer w0.381: H1.14 H1.15 29.134,10.414 ; v1(28.829,14.148) 28.829,14.089 29.134,13.784 29.134,10.414 ; U2.7 30.963,9.627 v1(30.175,10.414) 29.134,10.414 ; v1(39.573,10.236) 39.599,10.262 U9.6
2_16: H1.16 R8.1 | length 4.3
  Bottom Layer w0.381: H1.16 30.404,3.249 31.072,3.917 31.072,5.066 30.659,5.479 R8.1
2_17: H1.17 U7.2 | length 15
  Top Layer w0.381: H1.17 31.674,2.261 32.614,3.2 38.786,3.2 39.91,4.324 39.91,8.442 40.713,9.246 U7.2
2_18: H1.18 U8.2 U9.5 | length 24.7
  Top Layer w0.381: v1(30.048,11.43) 30.09,11.388 30.663,11.388 31.459,10.592 U8.2
  Layer 1 w0.381: v1(30.048,11.43) 39.368,11.43 39.427,11.49 39.582,11.49 v1(39.624,11.532)
  Layer 2 w0.381: v1(30.048,11.43) 30.056,11.422 30.92,11.422 31.928,10.414 31.928,3.785 32.868,2.844 32.868,2.003 H1.18
  Bottom Layer w0.381: v1(39.624,11.532) U9.5
2_19: D2.2 H1.19 U1.8 U2.8 U2.9 U2.10 U2.15 U5.6 U5.7 U5.8 U8.7 U9.7 U11.8 U11.13 | length 101.1
  Top Layer w0.381: D2.2 6.985,24.802 9.426,27.243 9.426,27.943 U1.8 ; v1(13.335,18.517) 13.335,18.479 13.622,18.192 U5.7 U5.6 ; v1(28.575,16.027) 29.489,16.942 U8.7
  Layer 1 w0.381: v1(13.335,18.517) 14.605,18.517 14.884,18.796 21.801,18.796 24.892,15.705 v1(24.892,15.697) ; v1(27.661,8.382) 27.673,8.395 30.594,8.395 v1(30.607,8.407) 30.632,8.382 37.363,8.382 38.069,9.088 v1(39.502,9.088) 40.584,9.088 41.808,10.312 41.808,16.662 38.397,20.074 36.234,20.074 36.217,20.057 35.881,20.057 v1(35.839,20.015)
  Layer 2 w0.381: v1(6.985,24.816) 7.01,24.816 13.31,18.517 v1(13.335,18.517)
  Bottom Layer w0.381: v1(24.892,15.697) 24.937,15.697 25.216,15.977 U2.15 27.94,15.977 27.949,15.985 28.533,15.985 v1(28.575,16.027) ; v1(27.661,8.382) 27.648,8.369 26.422,8.369 U2.9 U2.10 26.834,9.627 27.94,10.733 27.94,15.9 ; v1(30.607,8.407) 30.632,8.382 31.833,8.382 U2.8 31.928,8.357 32.029,8.255 32.029,5.309 34.214,3.124 H1.19 ; 35.609,20.305 35.609,21.454 U11.13 35.56,22.352 36.5,23.292 40.919,23.292 41.529,23.901 41.529,26.797 40.869,27.457 40.757,27.457 40.64,27.575 U11.8 ; v1(39.502,9.088) 39.562,9.088 39.658,8.992 U9.7
2_20: H1.20 U8.12 U9.12 | length 27.2
  Top Layer w0.381: U8.12 27.596,11.862 29.642,13.908 29.642,14.91 v1(29.616,14.935)
  Layer 1 w0.381: v1(29.616,14.935) 34.646,14.935 v1@36.97,12.611
  Layer 2 w0.381: H1.20 35.484,3.658 36.957,5.131 v1@36.957,12.598
  Bottom Layer w0.381: U9.12 35.692,14.072 36.94,12.823 36.94,12.64 v1(36.982,12.598)
2_21: H1.21 U5.3 | length 28.7
  Top Layer w0.305: U5.3 14.173,11.049 14.935,10.287 14.935,9.275 15.418,8.793 v1(15.418,7.468)
  Layer 1 w0.381: v1(15.418,7.468) 15.443,7.468 17.366,5.545 25.298,5.545 27.389,3.454 35.916,3.454 36.645,2.725 36.645,2.036 H1.21
2_22: H1.22 U9.8 | length 8.6
  Bottom Layer w0.381: U9.8 35.259,8.95 35.958,8.95 36.627,8.28 36.627,4.47 38.024,3.073 H1.22
2_23: C1.1 C2.1 C3.1 C4.1 H1.23 | length 53.8
  Top Layer w0.508: C4.1 C1.1 C2.1 C3.1 1.704,4.265 5.537,0.432 38.481,0.432 39.185,1.136 39.185,1.818 H1.23
2_24: H1.24 U9.9 U9.10 | length 12.8
  Bottom Layer w0.381: U9.10 U9.9 35.692,10.262 37.49,8.463 37.49,5.055 38.176,4.369 39.37,4.369 40.564,3.175 H1.24
2_25: H2.1 U10.1 U11.14 | length 15
  Top Layer w0.381: v1(40.513,25.857) 40.513,25.916 40.361,26.069 U10.1 40.361,29.134 40.583,29.356 H2.1
  Bottom Layer w0.381: U11.14 34.323,21.536 34.323,22.791 35.636,24.105 38.76,24.105 v1(40.513,25.857)
2_26: H2.2 H2.3 R6.1 U7.6 U7.14 U9.1 | length 36.2
  Top Layer w0.381: R6.1 34.536,19.144 34.536,18.804 35.56,17.78 36.525,17.78 38.278,16.027 ; U7.14 37.135,10.516 38.278,11.659 38.278,14.326 ; H2.3 H2.2 ; v1(39.497,16.053) 38.303,16.053 38.278,16.027 ; U7.6 38.278,14.326 ; 38.278,14.326 38.278,16.027
  Layer 2 w0.381: H2.2 39.313,16.296 39.497,16.112 v1(39.497,16.053)
  Bottom Layer w0.381: v1(39.497,16.053) 40.056,16.612 U9.1
2_28: H2.4 R3.2 | length 33.6
  Top Layer w0.508: R3.2 5.268,31.594 5.464,31.79 5.664,31.79 7.529,33.655 35.662,33.655 36.689,32.628 36.689,32.038 H2.4
2_29: H2.5 H2.6 U7.1 U7.9 U10.3 | length 31.3
  Top Layer w0.381: H2.6 H2.5 35.503,30.943 37.811,28.635 37.811,27.779 U10.3 37.821,25.933 v1(37.49,25.603) ; U7.9 36.054,16.866 37.194,15.725 37.194,15.621 37.465,15.35 v1(37.465,15.291) ; v1(40.654,7.976) U7.1
  Layer 2 w0.381: v1(37.465,15.291) 37.478,15.303 37.478,25.59 v1(37.49,25.603)
  Bottom Layer w0.381: v1(37.465,15.291) 38.278,14.478 38.278,9.26 39.562,7.976 v1(40.654,7.976)
2_31: H2.7 U10.4 U12.6 | length 14.3
  Top Layer w0.381: H2.7 33.072,31.844 33.072,31.215 34.112,30.175 34.632,30.175 36.551,28.256 U10.4
  Bottom Layer w0.381: U12.6@26.873,27.706 27.008,27.84 27.008,28.278 27.965,29.235 30.551,29.235 32.963,31.648 H2.7
2_32: H2.8 U3.5 | length 10.8
  Top Layer w0.381: U3.5 23.66,27.63 23.66,28.994 v1(23.673,29.007)
  Bottom Layer w0.254: v1(23.673,29.007) 24.663,29.997 30.043,29.997 31.693,31.648 H2.8
2_33: H2.9 U10.13 U12.4 | length 24.5
  Top Layer w0.381: U10.13 v1(36.551,25.629)
  Layer 1 w0.381: v1(24.46,25.984) 25.146,26.67 30.328,26.67 ; 30.404,30.683 30.404,31.934 H2.9 30.423,26.766 30.328,26.67 ; v1(36.551,25.629) 35.509,26.67 30.328,26.67
  Bottom Layer w0.381: U12.4@24.333,27.706 24.418,27.621 24.418,26.026 v1(24.46,25.984)
2_34: H2.10 U1.7 | length 26.2
  Top Layer w0.254: v1(9.5,30.328) 10.719,29.108 U1.7
  Layer 2 w0.254: v1(9.5,30.328) 9.5,32.563 10.516,33.579 28.042,33.579 28.921,32.699 28.921,32.648 29.153,32.417 H2.10
2_35: H2.11 U2.2 U10.14 U12.3 | length 36
  Top Layer w0.254: v1(33.163,16.951) 33.163,17.045 33.376,17.257 33.376,20.117 34.112,20.853 36.83,20.853 37.821,21.844 U10.14
  Layer 2 w0.254: H2.11 27.883,30.689 33.14,25.432 33.14,16.974 v1(33.163,16.951)
  Bottom Layer w0.254: U12.3@23.063,27.706 22.992,27.777 22.992,29.774 23.978,30.759 27.203,30.759 27.651,31.207 27.651,31.258 27.883,31.49 H2.11 ; U2.2 32.236,15.977 33.163,16.904 v1(33.163,16.951)
2_36: H2.12 U1.5 U6.1 U6.9 | length 40.9
  Top Layer w0.254: v1(11.354,25.044) 13.259,26.949 U1.5
  Layer 1 w0.254: v1(11.354,25.044) 11.354,28.127 10.338,29.143 10.338,32.563 11.328,33.553 25.527,33.553 26.381,32.699 26.381,32.648 26.613,32.417 H2.12
  Bottom Layer w0.254: U6.1 9.576,26.88 11.383,25.073 15.673,25.073 18.466,22.28 U6.9
2_37: H2.13
2_38: H2.14 U3.4 | length 4.7
  Top Layer w0.381: H2.14 24.182,31.844 24.182,31.266 24.917,30.531 U3.4
2_39: H2.15
2_40: H2.16 R5.2 U6.6 | length 10.4
  Bottom Layer w0.508: U6.6 15.943,27.323 15.943,28.471 15.276,29.139 15.276,29.865 15.347,29.936 15.601,29.936 16.094,30.429 20.701,30.429 21.449,31.177 21.449,31.869 H2.16
2_41: H2.17 U9.11 | length 29.7
  Layer 2 w0.254: H2.17 20.263,29.368 22.022,27.61 27.864,27.61 31.623,23.851 31.623,21.133 30.759,20.269 30.759,16.815 v1(33.985,13.589)
  Bottom Layer w0.254: v1@33.985,13.549 U9.11@34.732,12.802
  Bottom Layer w0.381: v1@33.985,13.549 v1(33.985,13.589) ; U9.11@34.732,12.802 U9.11
2_42: H2.18 U6.12 | length 11.9
  Layer 1 w0.381: v1(14.63,24.079) 18.993,28.442 H2.18
  Bottom Layer w0.381: v1(14.63,24.079) 14.656,24.054 U6.12
2_43: H2.19
2_44: H2.20 R4.1 U6.14 | length 14.5
  Layer 1 w0.254: v1(13.208,24.13) 16.453,27.375 H2.20
  Bottom Layer w0.254: R4.1 11.262,19.908 12.116,20.762 U6.14 12.116,23.038 v1(13.208,24.13)
2_45: H2.21
2_46: H2.22 U3.12 U4.9 U4.11 U6.15 | length 46
  Top Layer w0.254: U3.12 v1(26.187,23.673)
  Layer 1 w0.254: v1(15.342,20.701) 17.374,22.733 25.248,22.733 v1(26.187,23.673)
  Layer 2 w0.254: v1(12.065,24.232) 12.131,24.165 12.131,23.911 v1(15.342,20.701) 16.332,20.701 19.38,17.653 19.38,15.951 18.048,14.619 18.048,13.422 v1(18.694,12.776)
  Layer 2 w0.381: v1(12.065,24.232) 12.098,24.265 12.098,28.303 13.913,30.118 H2.22
  Bottom Layer w0.254: U4.9 17.12,10.287 16.489,10.918 16.489,12.189 17.127,12.827 U4.11 17.62,12.802 18.669,12.802 v1(18.694,12.776)
  Bottom Layer w0.381: U6.15 10.846,23.012 v1(12.065,24.232)
2_47: C14.2 C16.2 C18.2 C25.2 C27.2 D1.2 H2.23 H2.24 R4.2 R5.1 U3.1 U3.2 U3.14 U4.13 U4.14 U6.7 U6.16 U7.7 U7.16 U10.2 U10.16 U12.16 U13.16 U14.16 | length 134
  Top Layer w0.381: H2.23 12.752,31.844 12.752,31.215 13.64,30.328 16.764,30.328 v1(17.729,29.362) ; v1(16.535,7.719) 16.577,7.761 16.577,8.376 16.66,8.458 U14.16 ; U3.2 U3.1 28.727,24.181 ; v1(28.245,24.13) 28.287,24.172 28.719,24.172 28.727,24.181 ; U3.14 28.727,24.181 ; C14.2 34.483,6.817 v1(34.036,7.264) 34.74,7.969 35.622,7.969 U7.16 ; U10.2 39.091,25.654 40.361,24.384 v1(40.361,24.13) U10.16 40.361,20.434 39.406,19.479 C16.2 39.406,19.132 39.665,18.872 v1(42.037,18.872) ; U7.7 41.121,15.638 42.079,15.638 42.52,16.078 ; v1@42.146,18.673 42.52,18.3 42.52,16.104
  Layer 1 w0.381: v1(9.347,20.701) 10.16,19.888 v1(14.58,19.888) ; v1(19.431,23.978) 20.16,24.706 27.609,24.706 28.186,24.13 v1(28.245,24.13) 33.909,24.13 ; v1(33.903,24.949) 33.903,24.136 33.909,24.13 ; v1(40.361,24.13) 33.909,24.13
  Layer 2 w0.381: v1(14.58,19.888) 14.605,19.863 14.605,9.649 v1(16.535,7.719) ; v1(33.903,24.949) 33.903,19.818 34.9,18.821 34.9,8.128 v1(34.036,7.264)
  Bottom Layer w0.381: C18.2 8.077,26.594 ; R4.2 9.362,21.335 9.576,21.549 U6.16 9.576,23.8 8.077,25.298 8.077,26.594 ; H2.24 H2.23 12.643,30.521 13.376,29.789 R5.1 13.241,29.405 9.212,29.405 8.077,28.27 8.077,26.594 ; U13.16 14.381,8.357 14.436,8.302 C27.2@14.436,5.793 ; C27.2@14.539,5.89 15.33,6.68 D1.2@16.485,6.68 ; D1.2 16.51,6.726 16.51,7.693 v1(16.535,7.719) ; U4.13 U4.14 17.608,16.65 18.28,16.65 v1(18.293,16.662) ; v1(17.729,29.362) 17.729,29.248 17.196,28.715 U6.7 17.196,26.821 17.305,26.711 17.305,26.535 19.634,24.206 ; 19.647,24.194 20.523,23.317 U12.16 U12.16@20.504,22.123 ; C25.2 41.285,18.872 v1(42.037,18.872)
+5V: C17.2 C20.2 C21.2 C22.2 C24.2 U1.16 U2.16 U5.16 U8.1 U8.5 U8.6 U8.13 U8.14 U9.4 U9.14 U11.16 | length 103.5
  Top Layer w0.508: U5.16 9.474,8.509 10.124,7.859 C20.2 10.32,5.646 10.32,4.589 v1(10.516,4.394) ; v1(17.856,20.658) 18.249,20.265 18.249,20.252 18.463,20.038 18.463,19.754 C24.2 ; v1@17.874,20.676 18.339,21.141 U1.16 ; U8.13 U8.14 28.88,9.322 ; v1(28.296,7.341) 28.321,7.366 28.88,7.366 ; C21.2 28.463,5.966 28.88,6.382 28.88,7.366 ; U8.1 28.88,9.322 ; v1(34.011,16.332) 33.986,16.332 33.343,15.689 31.902,15.689 U8.6 U8.5 31.867,14.384 31.199,14.384 28.88,12.065 28.88,9.322 ; 28.88,7.366 28.88,9.322
  Layer 1 w0.508: v1(17.856,20.658) 18.966,21.768 27.407,21.768 29.294,19.88 29.294,18.413 29.221,18.34 v1(29.221,18.316) ; v1(28.296,7.341) 29.718,5.918 35.974,5.918 36.889,6.833 v1(41.478,6.833)
  Layer 2 w0.508: v1(10.516,4.394) 11.532,3.378 24.333,3.378 v1@28.278,7.323
  Bottom Layer w0.508: U2.16 28.153,17.247 v1(29.221,18.316) ; v1@29.185,18.339 C22.2@29.754,18.908 ; U11.16 31.75,20.712 31.691,20.653 31.423,20.653 30.672,19.903 29.95,19.903 29.754,19.707 C22.2@29.754,18.908 ; v1(34.011,16.332) 33.993,16.35 33.993,17.264 32.868,18.39 30.051,18.39 29.754,18.687 C22.2@29.754,18.908 ; 34.297,16.594 35.174,16.594 U9.14 37.313,16.612 39.395,14.529 39.395,13.335 39.929,12.802 U9.4 ; C17.2 41.471,5.697 41.471,6.825 v1(41.478,6.833)
NetC1_2: C1.2 U5.2 U5.12 | length 11
  Top Layer w0.381: C1.2 6.148,14.808 7.368,13.589 9.158,13.589 9.644,13.103 12.945,9.802 13.599,9.802 U5.2
NetC2_2: C2.2 U5.4 U5.14 | length 10.1
  Top Layer w0.381: C2.2 4.994,11.405 6.98,11.405 7.335,11.049 8.468,11.049 9.28,11.862 9.832,11.862 v1(9.894,11.8) ; v1(12.598,12.751) 12.608,12.751 13.039,12.319 U5.4
  Bottom Layer w0.381: v1(9.894,11.8) 10.845,12.751 v1(12.598,12.751)
NetC3_2: C3.2 U5.1 U5.15 | length 10.1
  Top Layer w0.381: C3.2 4.704,9.032 5.089,9.416 6.775,9.416 7.115,9.756 7.895,9.756 U5.15 10.846,9.779 12.162,8.463 13.576,8.463 U5.1
NetC4_2: C4.2 U5.5 U5.11 | length 10.9
  Top Layer w0.381: C4.2 4.704,17.531 7.377,14.859 U5.11 10.008,14.859 11.278,13.589 U5.5
NetC5_2: C5.2 C6.2 C7.2 C8.2 C9.2 C10.2 C11.2 C12.2 C13.2 D4.2 R8.2 U13.7 U14.7 | length 65.5
  Top Layer w0.254: v1(21.184,15.723) 21.539,16.078 U14.7
  Top Layer w0.381: D4.2 2.013,21.397 2.123,21.506 2.123,22.256 2.184,22.318 v1(2.184,22.377)
  Layer 1 w0.381: v1(9.881,15.977) 9.974,15.977 10.202,16.205 14.63,16.205 15.138,15.697 21.158,15.697 v1(21.184,15.723)
  Layer 2 w0.381: v1(21.184,15.723) 21.184,15.672 25.4,11.455 25.4,8.407 v1(26.594,7.214)
  Layer 2 w0.762: v1(2.184,22.377) 8.585,15.977 v1@9.677,15.977
  Bottom Layer w0.254: v1(26.594,7.214) 26.594,7.194 27.659,6.129 R8.2
  Bottom Layer w0.381: C11.2@2.081,2.464 C11.2 ; C11.2@2.132,3.2 2.132,17.134 v1@2.132,22.314 ; v1(2.184,22.377) 2.184,23.722 C10.2 1.748,24.159 1.748,29.431 1.727,29.451 C5.2 ; U13.7 v1(9.881,15.977)
NetC6_1: C6.1 U13.4 U14.12 | length 18.5
  Top Layer w0.254: v1(15.875,13.64) 15.901,13.614 16.884,13.614 U14.12
  Layer 1 w0.254: v1(6.655,13.157) 6.655,13.208 8.153,14.707 14.453,14.707 15.457,13.702 15.813,13.702 v1(15.875,13.64)
  Bottom Layer w0.254: C6.1 5.107,16.809 6.299,15.617 6.299,13.946 6.859,13.387 6.655,13.183 v1(6.655,13.157) ; 6.871,13.374 8.079,12.167 U13.4
NetC7_1: C7.1 U13.2 U14.15 | length 17.3
  Top Layer w0.254: v1(15.808,9.914) 15.898,9.914 16.008,9.804 16.884,9.804 U14.15
  Layer 1 w0.254: v1(6.655,10.439) 7.183,9.911 15.805,9.911 v1(15.808,9.914)
  Bottom Layer w0.254: C7.1 5.543,13.758 5.543,13.126 6.655,12.014 v1(6.655,10.439) 7.468,9.627 U13.2
NetC8_1: C8.1 U13.5 U14.14 | length 17.8
  Top Layer w0.254: v1(15.723,11.582) 15.926,11.379 15.997,11.379 16.378,10.998 U14.14
  Layer 1 w0.254: v1(10.389,13.411) 12.217,11.582 v1(15.723,11.582)
  Bottom Layer w0.254: C8.1 5.107,19.748 6.909,17.946 6.909,14.607 8.079,13.437 U13.5 8.641,13.424 10.376,13.424 v1(10.389,13.411)
NetC9_1: C9.1 U13.1 U14.13 | length 18.8
  Top Layer w0.381: v1(15.824,12.7) 15.866,12.658 16.022,12.658 16.412,12.268 U14.13
  Layer 1 w0.254: v1(5.822,10.216) 5.888,10.282 5.888,10.636 9.4,14.148 13.767,14.148 15.215,12.7 v1(15.824,12.7)
  Bottom Layer w0.381: C9.1 5.107,10.931 5.864,10.174 5.864,9.91 7.357,8.416 8.569,8.416 U13.1
NetC10_1: C10.1 U13.12 U14.4 | length 35.7
  Top Layer w0.254: U14.4 22.74,12.192 23.545,12.192 v1(24.359,11.379)
  Layer 1 w0.254: v1(11.887,17.247) 16.535,17.247 16.866,17.577 21.514,17.577 24.359,14.732 v1(24.359,11.379)
  Bottom Layer w0.254: C10.1 6.071,23.774 8.077,21.768 8.077,19.177 8.992,18.263 10.922,18.263 v1@11.913,17.272 ; v1@11.938,17.245 11.938,14.605 13.106,13.437 U13.12
NetC11_1: C11.1 U13.15 U14.2 | length 27.1
  Top Layer w0.381: U14.2 23.212,9.728 23.517,9.423 v1(24.359,9.423)
  Layer 1 w0.381: v1(12.497,9.208) 12.535,9.169 17.424,9.169 17.958,8.636 20.93,8.636 21.717,9.423 v1(24.359,9.423)
  Bottom Layer w0.381: C11.1 7.468,2.438 12.471,7.442 12.471,8.891 ; v1@12.516,9.188 12.954,9.627 U13.15
NetC12_1: C12.1 U13.14 U14.5 | length 24.8
  Top Layer w0.381: v1(20.345,14.021) 20.405,14.021 20.887,13.538 U14.5
  Layer 1 w0.381: v1(15.531,10.733) 15.553,10.712 16.198,10.712 17.272,11.786 17.272,13.97 18.212,14.91 19.456,14.91 v1(20.345,14.021)
  Bottom Layer w0.381: C12.1 9.086,5.378 11.328,7.62 11.328,9.855 12.37,10.897 U13.14 14.356,10.874 15.331,10.874 15.472,10.733 v1(15.531,10.733)
NetC13_1: C13.1 U13.13 U14.1 | length 27.7
  Top Layer w0.381: v1(21.742,7.95) 21.742,7.976 21.819,8.052 21.819,8.088 22.189,8.458 U14.1
  Layer 1 w0.381: v1(8.814,7.391) 13.335,7.391 14.407,8.463 16.979,8.463 17.492,7.95 v1(21.742,7.95)
  Bottom Layer w0.381: C13.1 5.107,7.992 5.491,7.607 8.539,7.607 8.755,7.391 v1(8.814,7.391) 8.856,7.433 9.669,7.433 10.592,8.357 10.592,10.363 12.09,11.862 13.446,11.862 13.751,12.167 U13.13
NetD1_1: D1.1 R2.1 U3.9 U4.12 | length 28.2
  Top Layer w0.254: v1(17.678,4.801) 17.745,4.867 18.237,4.867 18.887,5.517 R2.1 ; v1(21.022,23.871) 21.116,23.871 21.214,23.773 21.247,23.773 22.377,22.642 U3.9
  Layer 2 w0.254: v1(17.678,4.801) 18.517,4.801 20.168,6.452 20.168,12.633 v1(18.729,14.072) ; v1@18.745,14.072 18.745,14.087 19.99,15.332 19.99,22.838 v1@21.013,23.862
  Bottom Layer w0.254: D1.1@16.891,4.78 16.911,4.801 v1(17.678,4.801) ; U4.12 17.608,14.084 18.717,14.084 v1(18.729,14.072)
NetD1_3: D1.3 R1.2 | length 6.9
  Layer 1 w0.381: v1(18.974,7.087) 22.979,7.087 23.005,7.06 23.174,7.06 v1(23.216,7.018)
  Bottom Layer w0.381: v1(18.974,7.087) 18.985,7.076 D1.3 ; v1(23.216,7.018) 23.236,6.998 23.236,5.735 R1.2
NetD2_1: D2.1 D3.2 | length 3.6
  Top Layer w0.381: D2.1 2.031,24.821 2.14,24.931 D3.2
NetD3_1: D3.1 R3.1 U5.13 | length 25.8
  Top Layer w0.381: R3.1@3.571,31.191 R3.1 3.251,31.278 3.251,28.346 ; D3.1 3.312,28.286 3.251,28.346 ; U5.13 6.325,12.319 5.41,13.233 4.039,13.233 3.251,14.021 3.251,28.346
NetR7_1: R7.1 U8.3 | length 7.1
  Top Layer w0.254: U8.3 32.258,11.862 33.198,10.922 33.198,7.671 33.147,7.62 v1(33.147,7.468)
  Bottom Layer w0.254: v1@33.169,7.468 33.169,6.038 R7.1
NetR7_2: R7.2 U9.13 | length 11.6
  Bottom Layer w0.254: U9.13 34.646,15.342 33.304,14 33.304,12.949 33.909,12.344 33.909,8.42 35.392,6.937 R7.2
NetU1_10: U1.10 U5.10 | length 9.9
  Top Layer w0.381: U5.10 7.368,16.129 6.502,16.994 6.502,18.186 7.061,18.745 8.915,18.745 10.719,20.549 U1.10
NetU1_11: U1.11 U5.9 | length 7.2
  Top Layer w0.381: U5.9 8.966,17.399 11.989,20.422 U1.11
NetU2_1: U2.1 U2.6 U4.6 U4.8 | length 23.4
  Layer 1 w0.381: v1(18.593,9.38) 18.652,9.38 19.584,10.312 v1(24.003,10.312) 26.619,10.312 28.702,12.395 v1(30.404,12.395)
  Bottom Layer w0.381: U4.8 18.102,9.017 18.424,9.339 18.551,9.339 v1(18.593,9.38) ; U4.6 23.068,10.31 24,10.31 v1(24.003,10.312) ; U2.6 31.493,10.897 31.392,10.998 31.392,11.156 30.404,12.144 v1(30.404,12.395) 30.404,16.612 31.013,17.221 31.833,17.221 U2.1
NetU3_6: U3.6 U3.10 | length 6
  Top Layer w0.381: U3.6 22.377,27.142 23.647,25.872 U3.10
NetU4_1: U4.1 U4.2 U4.5 U6.4 | length 28.1
  Layer 2 w0.254: v1(13.36,25.832) 15.138,25.832 16.307,24.663 21.59,24.663 22.936,23.317 22.936,18.669 v1(21.083,16.816)
  Bottom Layer w0.254: v1(21.083,16.816) 21.177,16.816 21.356,16.637 U4.1 U4.2 23.52,15.367 24.402,14.486 24.402,12.475 23.614,11.688 23.614,11.683 23.488,11.557 U4.5
  Bottom Layer w0.381: v1(13.36,25.832) 13.373,25.845 13.373,27.292 U6.4
NetU7_10: U7.10 U7.15 | length 9
  Top Layer w0.381: U7.15 35.204,9.246 34.036,10.414 34.036,11.481 33.241,12.276 33.241,13.897 34.897,15.554 35.587,15.554 U7.10
NetU8_8: U8.8 U10.12 U12.7 | length 24.7
  Top Layer w0.254: v1(25.046,16.875) 25.079,16.909 26.401,16.909 U8.8 ; U10.12 v1(35.281,25.654)
  Layer 1 w0.254: v1(27.661,25.603) 27.711,25.654 v1(35.281,25.654)
  Layer 2 w0.254: v1(25.046,16.875) 25.046,23.7 26.949,25.603 v1(27.661,25.603)
  Bottom Layer w0.254: v1(27.661,25.603) 28.143,26.086 U12.7
NetU8_9: U8.9 U11.3 | length 16.4
  Top Layer w0.305: U8.9 26.859,15.672 27.686,16.499 27.686,19.279 30.271,21.864 30.551,21.864 v1(30.607,21.92)
  Bottom Layer w0.381: v1(30.607,21.92) 30.565,21.962 30.565,22.716 34.29,26.441 U11.3
NetU9_2: U9.2 U9.3 | length 1.3
  Bottom Layer w0.508: U9.3 U9.2
NetU10_5: U10.5 U12.5 | length 11.9
  Top Layer w0.254: v1(25.959,28.88) 26.052,28.88 26.484,29.312 34.188,29.312 35.281,28.219 U10.5
  Bottom Layer w0.254: U12.5 25.603,28.524 v1(25.959,28.88)
NetU10_6: U10.6 U10.10 | length 6
  Top Layer w0.381: U10.10 32.741,25.07 34.011,26.34 U10.6
NetU11_7: U11.7 U11.15 | length 11.2
  Bottom Layer w0.381: U11.15 33.02,23.012 34.866,24.859 37.799,24.859 39.37,26.43 U11.7
NetU12_10: U12.10 U13.11 U14.11 | length 19.3
  Top Layer w0.381: v1(15.646,14.707) 15.706,14.707 15.756,14.757 16.909,14.757 U14.11
  Bottom Layer w0.254: U13.11 v1(15.646,14.707) 16.34,15.4 16.34,16.839 17.814,18.313 24.728,18.313 26.078,19.663 26.149,19.663 27.643,21.157 27.643,21.166 28.143,21.666 U12.10
NetU12_11: U12.11 U13.10 U14.10 | length 17.3
  Top Layer w0.381: v1(15.596,16.561) 15.638,16.519 15.972,16.519 16.412,16.078 U14.10
  Bottom Layer w0.254: U13.10 14.947,15.977 15.662,16.691 15.662,16.969 17.743,19.05 24.333,19.05 26.675,21.392 26.675,22.084 U12.11@26.873,22.282
NetU12_12: U12.12 U13.9 U14.9 | length 15.3
  Top Layer w0.254: v1(15.641,17.928) 15.708,17.861 15.968,17.861 16.482,17.348 U14.9
  Bottom Layer w0.254: U13.9 14.942,17.247 14.942,17.267 15.603,17.928 v1(15.641,17.928) ; v1@15.649,17.935 17.475,19.761 23.698,19.761 25.603,21.666 U12.12@25.603,22.282
pads on no net: U1.12 U1.13 U1.14 U2.3 U2.4 U2.5 U2.11 U2.12 U2.13 U2.14 U3.3 U6.2 U6.3 U6.5 U6.10 U6.11 U6.13 U7.3 U7.4 U7.5 U7.11 U7.12 U7.13 U8.4 U10.11 U11.1 U11.2 U11.4 U11.5 U11.6 U11.9 U11.10 U11.11 U11.12 U12.13 U12.14

## Polygon pours and split planes (outlines as drawn)
2_19 on Layer 2 "2_19_L03_P034" (solid, pour order 34): 6.553,25.121 6.502,25.07 6.502,23.571 7.315,23.571 12.573,18.313 13.538,18.313 13.538,19.939 8.382,25.095
+5V on Layer 2 "+5V_L03_P026" (solid, remove dead copper, pour order 26): 10.236,4.521 10.236,3.073 26.162,3.073 28.499,5.41 28.499,7.518 27.762,7.518 24.206,3.962 11.328,3.962 10.516,4.775
2_47 on Layer 2 "2_47_L03_P022" (solid, remove dead copper, pour order 22): 33.503,25.095 33.503,24.994 33.503,18.898 34.341,18.059 34.341,8.89 33.604,8.153 33.604,6.629 35.687,6.629 35.662,6.655 35.662,14.783 35.255,15.189 35.255,25.095
2_47 on Layer 2 "2_47_L03_P021" (solid, remove dead copper, pour order 21): 13.995,20.168 13.995,9.347 16.027,7.315 17.678,7.315 17.678,11.201 17.323,11.557 17.323,15.088 18.644,16.408 18.644,17.577 16.078,20.142 15.951,20.142
2_1 on Layer 2 "2_1_L03_P013" (solid, pour order 13): 26.314,18.136 26.314,10.566 28.829,8.052 28.829,3.378 31.09,3.378 31.09,9.017 28.346,11.76 28.346,17.856 29.108,18.618 27.896,19.83
2_1 on Layer 2 "2_1_L03_P012" (solid, remove dead copper, pour order 12): 10.516,16.18 10.516,5.385 11.43,4.47 12.598,4.47 12.598,16.18
2_47 on Layer 2 "2_47_L03_P000" (solid, pour order 0): 13.995,20.168 13.995,9.398 16.332,7.061 17.043,7.772 17.043,7.798 14.935,9.906 14.935,20.168
2_19 on Layer 1 "2_19_L02_P035" (solid, pour order 35): 12.7,17.831 12.725,17.805 14.656,17.805 15.316,18.466 21.361,18.466 24.981,14.846 25.832,15.697 22.403,19.126 14.757,19.126 14.453,18.821 12.7,18.821
2_19 on Layer 1 "2_19_L02_P031" (solid, remove dead copper, pour order 31): 27.051,9.525 27.051,8.23 41.402,8.23 42.647,9.474 42.647,17.069 38.862,20.853 35.382,20.853 35.357,20.828 35.357,19.66 37.744,19.66 40.691,16.713 40.691,9.982 40.234,9.525 29.007,9.525
+5V on Layer 1 "+5V_L02_P027" (solid, remove dead copper, pour order 27): 27.864,7.671 27.864,5.131 36.373,5.131 37.592,6.35 41.935,6.35 41.935,7.341 35.509,7.341 34.722,6.553 32.334,6.553 31.217,7.671
+5V on Layer 1 "+5V_L02_P016" (solid, remove dead copper, pour order 16): 17.551,21.692 17.551,19.863 19.837,19.863 19.837,21.387 27,21.387 28.829,19.558 28.829,17.602 28.905,17.526 30.48,17.526 30.48,20.472 28.702,22.25 17.551,22.25
2_1 on Layer 1 "2_1_L02_P015" (solid, remove dead copper, pour order 15): 10.922,4.674 12.395,3.2 23.266,3.2 23.266,4.953 21.361,4.953 20.625,4.216 13.132,4.216 11.886,5.462
2_47 on Layer 1 "2_47_L02_P002" (solid, pour order 2): 18.948,25.654 18.948,23.495 23.724,23.495 24.46,24.232 27.203,24.232 28.524,22.911 40.919,22.911 40.97,22.962 40.97,24.74 28.219,24.74 27.991,24.968 24.181,24.968 23.495,25.654
2_47 on Layer 1 "2_47_L02_P001" (solid, remove dead copper, pour order 1): 14.935,19.482 8.56,19.482 8.56,21.641 8.534,21.666 14.3,21.666 14.3,20.32 14.935,20.32
2_19 on Bottom Layer "2_19_L04_P030" (solid, remove dead copper, pour order 30): 40.31,29.743 40.31,27.051 41.148,26.213 41.148,24.359 40.335,23.546 36.093,23.546 35.154,22.606 35.154,20.117 35.865,20.117 36.043,20.295 36.043,22.428 36.576,22.962 42.342,22.962 42.342,29.743
2_19 on Bottom Layer "2_19_L04_P029" (solid, pour order 29): 24.333,16.307 24.308,16.281 24.308,15.316 27.508,15.316 27.508,10.617 26.899,10.008 25.705,10.008 25.654,9.957 25.654,7.874 28.6,7.874 28.6,13.335 28.194,13.741 28.194,15.138 29.21,15.138 29.21,16.281
2_19 on Bottom Layer "2_19_L04_P028" (solid, remove dead copper, pour order 28): 30.099,8.712 30.099,7.493 30.124,7.468 31.521,7.468 31.521,4.699 33.731,2.489 33.731,1.626 33.884,1.473 34.646,1.473 34.646,3.124 32.512,5.258 32.512,8.712
+5V on Bottom Layer "+5V_L04_P024" (solid, remove dead copper, pour order 24): 42.418,12.421 42.367,12.37 39.294,12.37 38.811,12.852 38.837,12.878 38.837,14.58 37.414,16.002 33.757,16.002 33.757,16.891 32.842,17.805 29.286,17.805 28.321,16.84 25.832,16.84 25.832,17.577 26.01,17.755 28.143,17.755 29.185,18.796 29.185,20.437 30.419,20.437 31.242,21.26 31.242,22.733 31.293,22.784 32.258,22.784 32.283,22.758 32.283,20.904 30.963,19.583 30.963,18.923 31.115,18.771 32.995,18.771 34.62,17.145 37.363,17.145 40.005,14.503 40.005,13.538 42.418,13.538
2_47 on Bottom Layer "2_47_L04_P023" (solid, remove dead copper, pour order 23): 16.434,29.794 16.434,25.832 19.38,22.885 19.38,21.387 20.879,21.387 20.879,23.52 17.729,26.67 17.729,28.88 18.059,29.21 18.059,29.794
2_47 on Bottom Layer "2_47_L04_P020" (solid, remove dead copper, pour order 20): 13.564,8.814 13.564,6.706 13.564,5.105 15.24,5.105 15.24,5.918 15.494,6.172 16.993,6.172 17.069,6.172 17.069,6.198 17.069,8.001 16.231,8.839
2_47 on Bottom Layer "2_47_L04_P019" (solid, remove dead copper, pour order 19): 4.902,27.254 7.925,27.254 7.925,33.579 7.899,33.604 7.925,33.63 13.081,33.63 13.081,31.166 13.868,30.378 13.868,28.626 13.741,28.499 9.271,28.499 8.839,28.067 8.839,25.349 10.211,23.978 10.211,18.872 10.135,18.796 8.915,18.796 8.865,18.847 8.865,23.495 6.756,25.603 4.877,25.603
NetC5_2 on Bottom Layer "NETC5_2_L04_P014" (solid, remove dead copper, pour order 14): 0.432,31.572 0.432,1.499 2.54,1.499 2.54,31.551
2_1 on Bottom Layer "2_1_L04_P008" (solid, pour order 8): 22.098,9.474 22.098,7.696 21.463,7.061 21.463,4.039 22.835,4.039 22.835,7.188 23.876,8.23 23.876,9.474
2_1 on Bottom Layer "2_1_L04_P007" (solid, pour order 7): 12.167,6.274 12.167,5.334 10.744,3.912 10.744,1.067 13.132,1.067 13.132,3.378 13.462,3.708 13.462,6.299
2_1 on Bottom Layer "2_1_L04_P006" (solid, pour order 6): 31.496,19.888 31.572,19.812 39.98,19.812 39.98,17.374 39.929,17.424 34.849,17.424 33.249,19.025 31.471,19.025
2_1 on Bottom Layer "2_1_L04_P005" (solid, remove dead copper, pour order 5): 28.88,28.423 28.88,21.361 27.889,20.371 27.254,20.371 27.254,18.44 27.229,18.415 28.804,18.415 29.185,18.796 29.185,20.549 30.15,21.514 30.15,28.423
2_1 on Bottom Layer "2_1_L04_P004" (solid, pour order 4): 18.034,26.746 18.821,25.959 21.361,25.959 21.361,20.244 21.412,20.193 22.327,20.193 22.327,28.88 18.059,28.88 18.034,28.854
2_1 on Bottom Layer "2_1_L04_P003" (solid, pour order 3): 4.191,32.639 4.191,28.956 2.997,27.762 2.997,22.479 4.191,21.285 6.096,21.285 6.68,20.701 6.68,18.542 8.484,16.739 10.211,16.739 10.617,16.332 10.617,15.519 10.16,15.062 7.849,15.062 7.849,14.275 7.874,14.3 11.659,14.3 11.659,17.17 11.049,17.78 8.763,17.78 7.569,18.974 7.569,21.59 6.553,22.606 4.293,22.606 4.191,22.708 4.191,27.153 4.978,27.94 7.366,27.94 7.366,32.639
2_47 on Top Layer "2_47_L01_P036" (solid, remove dead copper, pour order 36): 38.506,28.753 38.506,28.702 38.506,24.892 38.76,24.892 39.929,23.724 39.929,18.313 39.954,18.288 42.037,18.288 42.316,18.009 42.316,16.281 41.986,15.951 41.961,15.977 40.284,15.977 40.107,15.799 40.107,15.037 42.443,15.037 42.977,15.57 42.977,24.257 42.088,25.146 40.437,25.146 39.675,25.908 39.675,28.753
2_19 on Top Layer "2_19_L01_P033" (solid, remove dead copper, pour order 33): 9.779,29.058 9.779,26.086 7.544,23.851 4.75,23.851 4.75,25.908 4.775,25.933 7.087,25.933 7.087,29.058
2_19 on Top Layer "2_19_L01_P032" (solid, pour order 32): 12.357,14.427 14.961,14.427 14.961,19.025 12.332,19.025
2_1 on Top Layer "2_1_L01_P011" (solid, pour order 11): 38.329,23.546 38.329,20.93 37.44,20.93 36.017,19.507 36.017,18.415 36.728,18.415 38.76,16.383 41.961,16.383 42.164,16.586 42.164,17.729 39.726,17.729 38.811,18.644 38.811,19.914 39.649,20.752 39.649,23.546
+5V on Top Layer "+5V_L01_P025" (solid, remove dead copper, pour order 25): 6.121,3.632 10.77,3.632 10.795,3.658 10.795,8.814 6.121,8.814